# Altium PCB pcb_multilayer.pcbdoc (part 1 of 3)
Units mil, origin at the board's own origin, x right, y up, seen from the top; angles counter-clockwise.
Board outline 8907.73 x 8667.62 mil, 2 copper layers (Top Layer, Bottom Layer); 214 components, 207 nets, 845 pads, 446 vias.
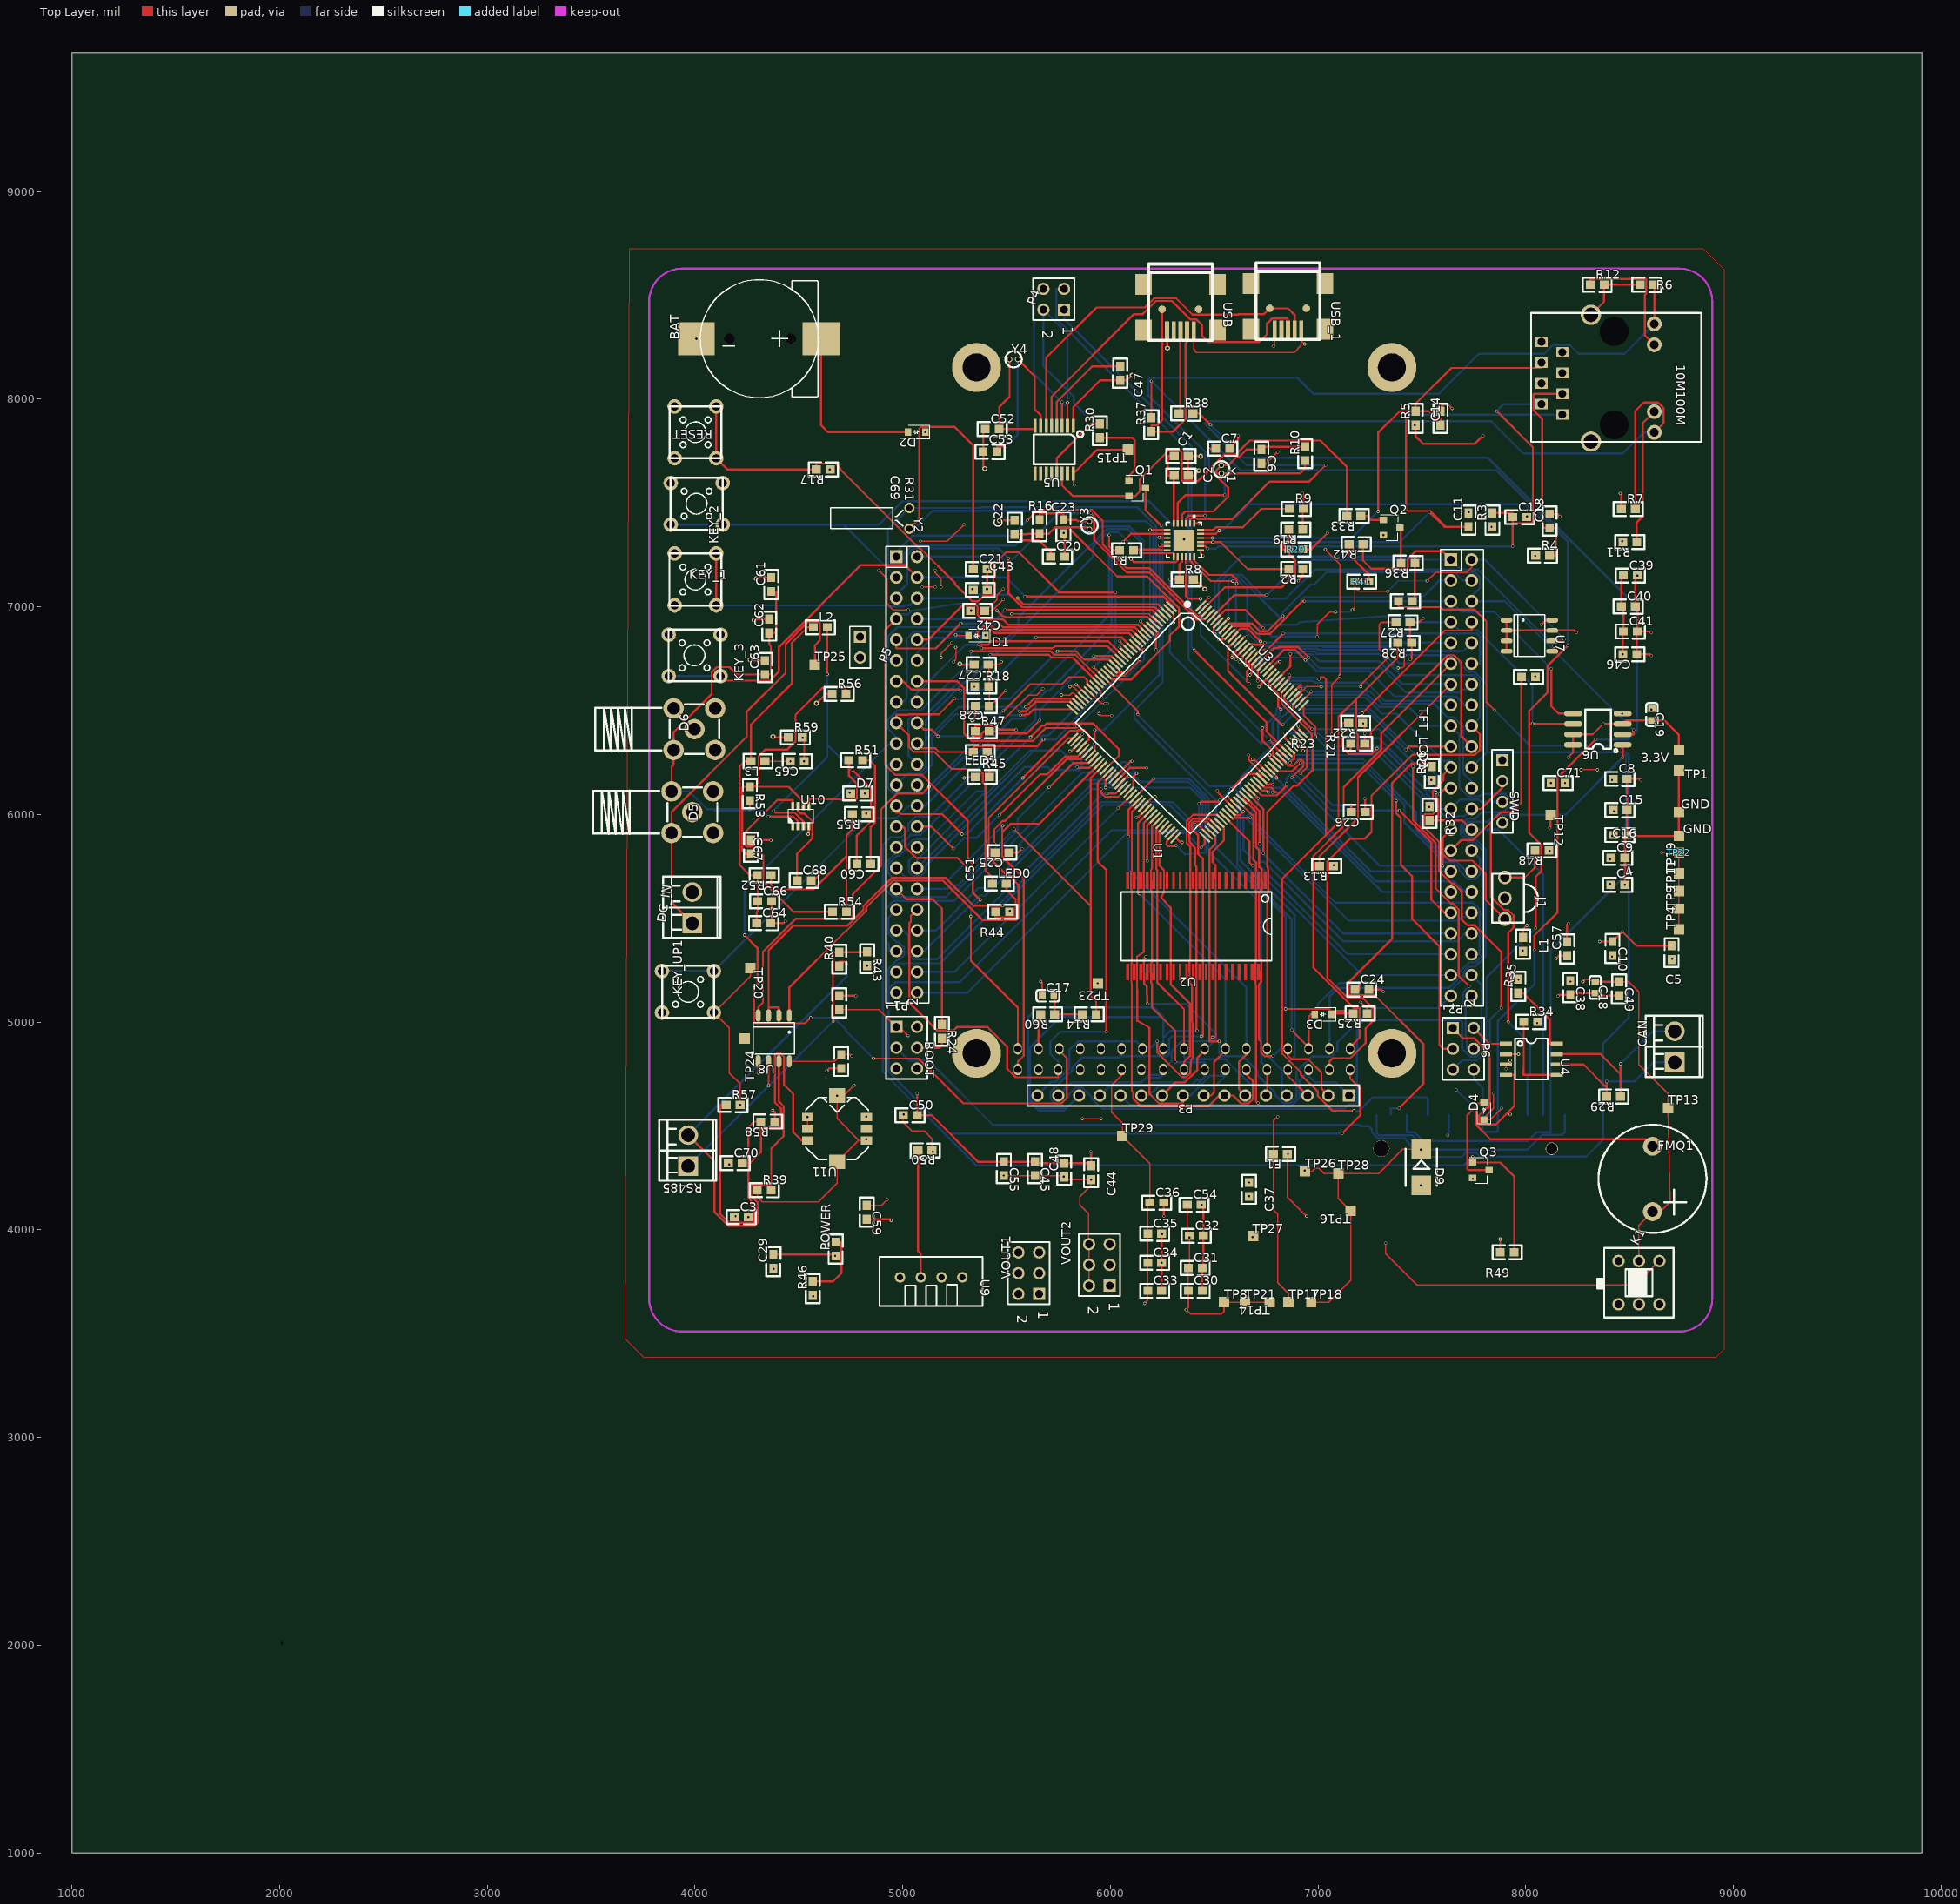
[diagram p0: Top Layer view]
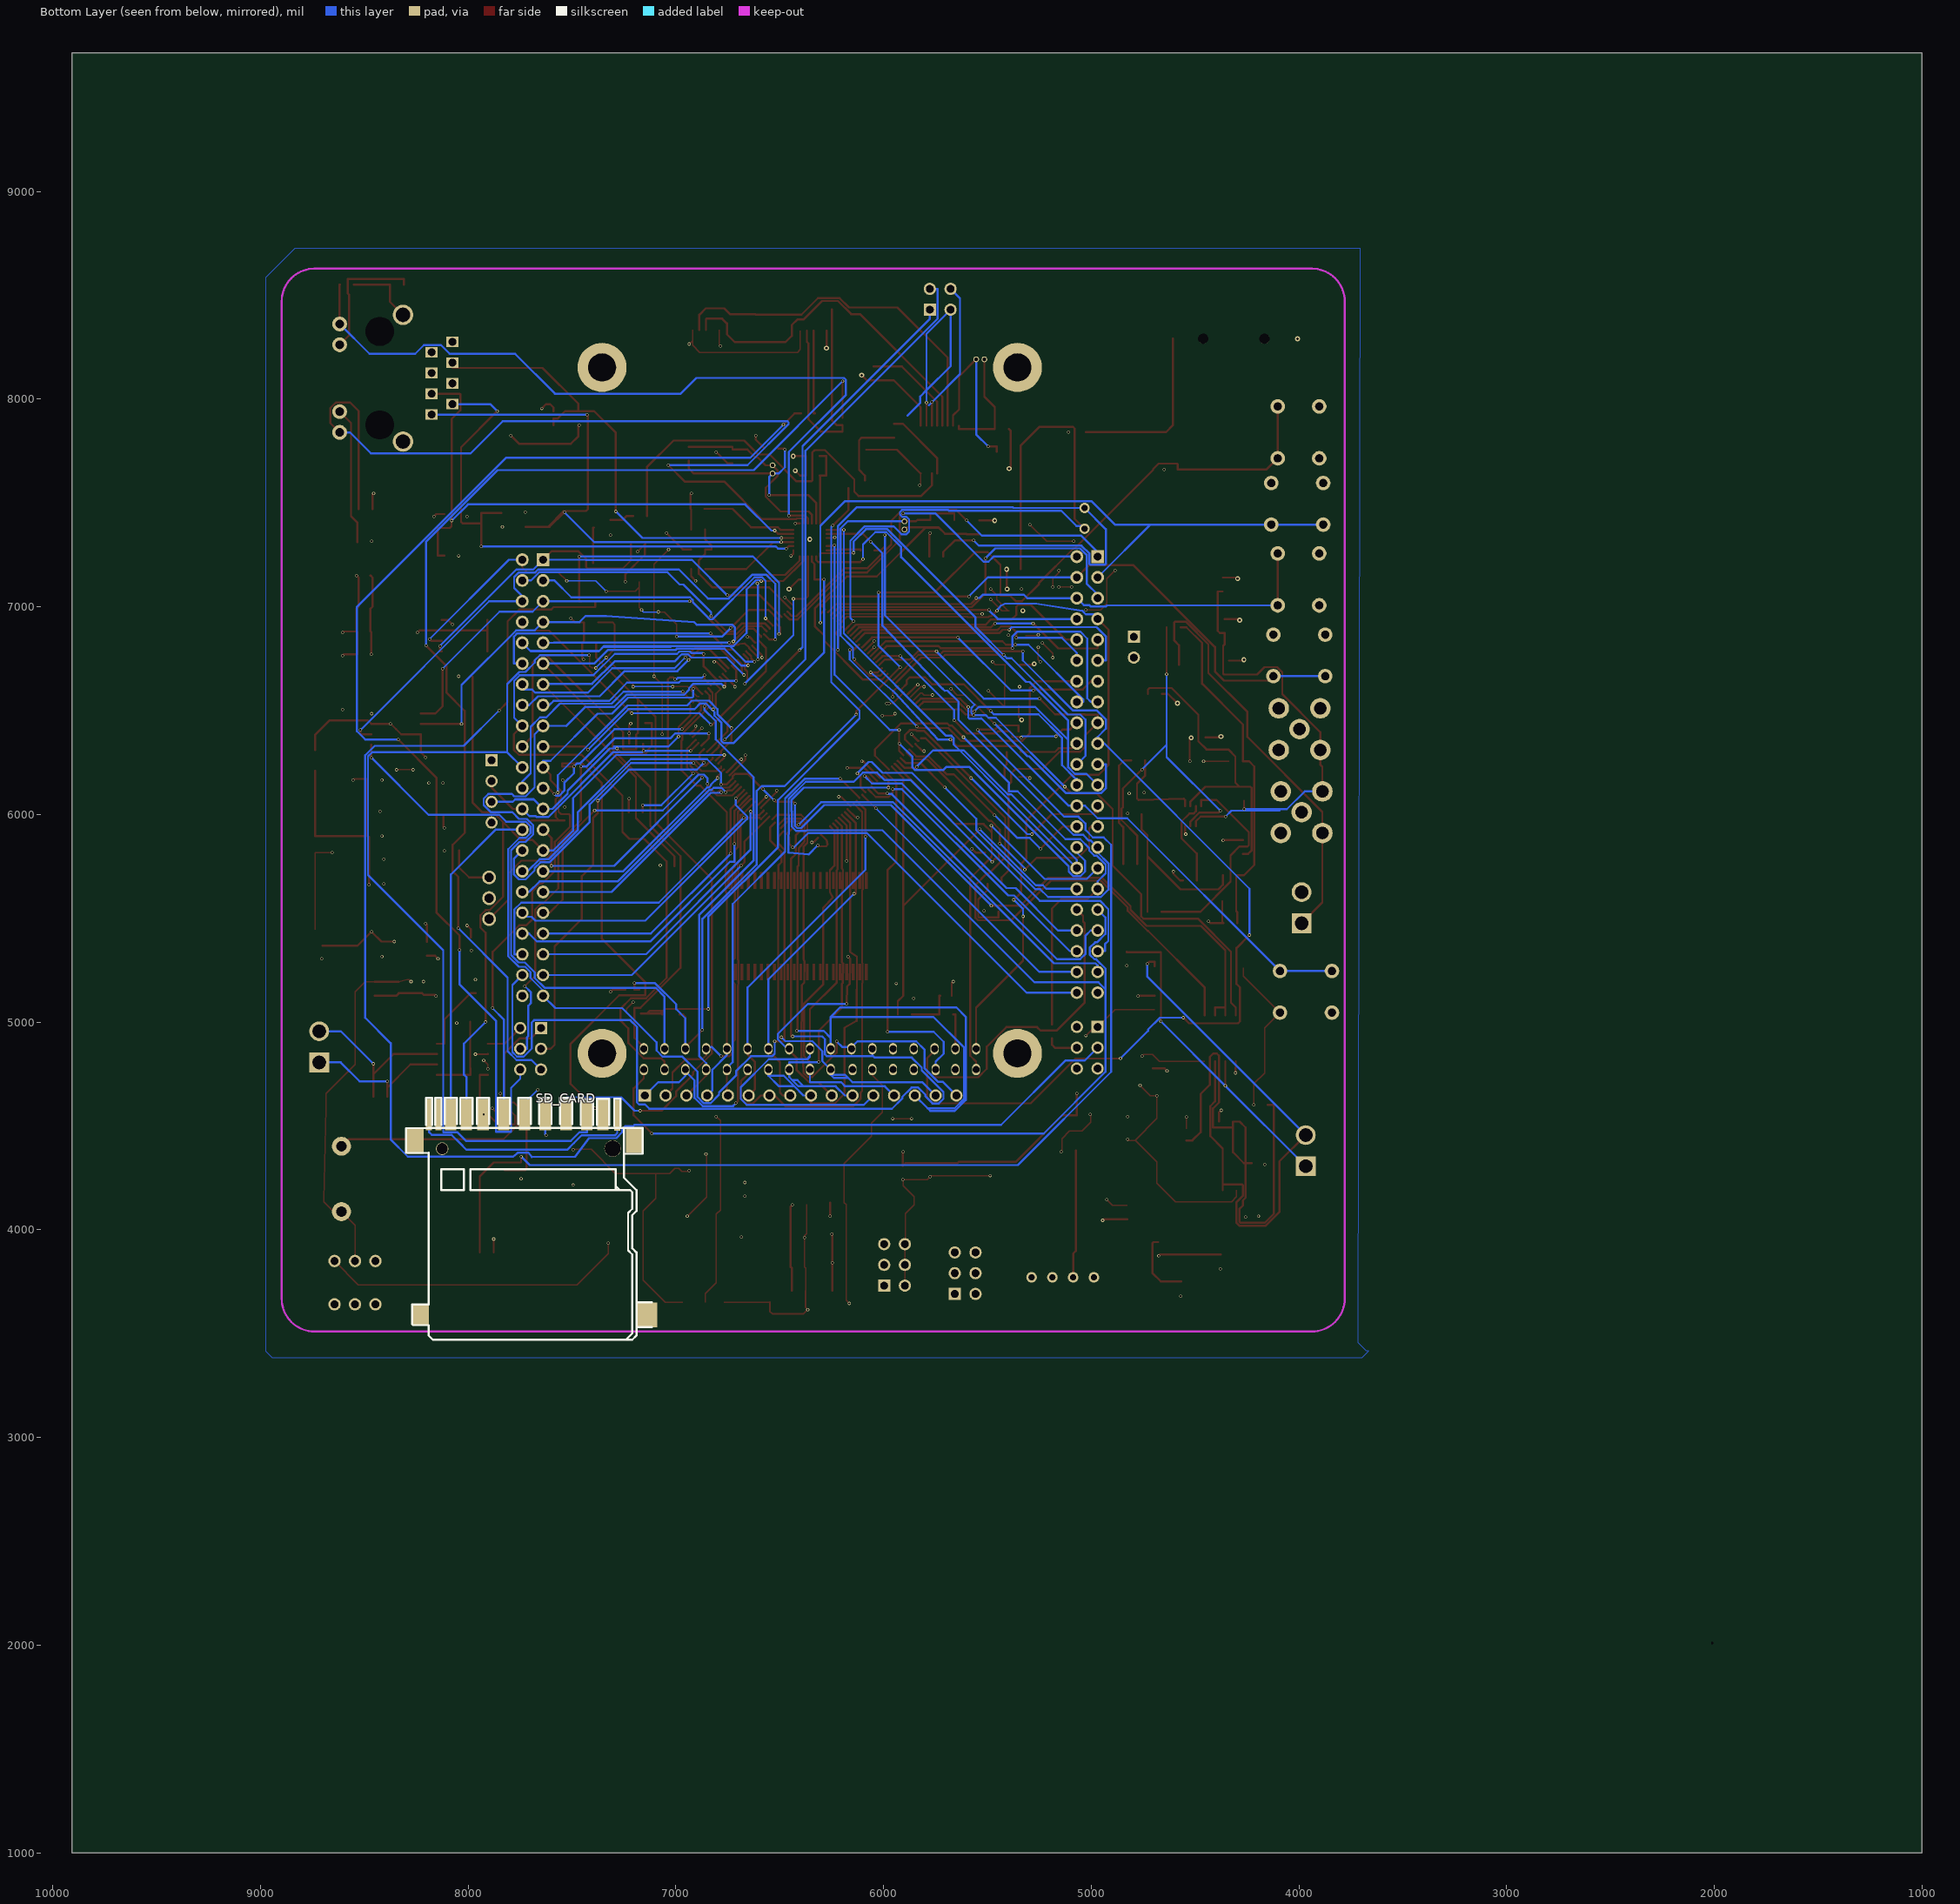
[diagram p1: Bottom Layer view, seen from below]

## Layer stack, top to bottom
Top Layer: signal copper (thickness not stored)
Dielectric: dielectric 12.6, FR-4, Dk 4.8
Bottom Layer: signal copper (thickness not stored)

## Board outline
9907.73,1000 1000,1000 1000,9667.62 9907.73,9667.62
cut-out: 2005,2005 2015,2005 2015,2015 2005,2015 2005,2005

## Components (designator, comment, footprint, x,y, rotation, side; value= is the part's Value field where it differs from the comment)
3.3V "TEST-POINT3X5" PAD.03X.05 8737.11,6310.62 r0 top
10M100M "RJ45" ?#1 8347.11,8100.62 r270 top
BAT "BATT" ?#2 4307.11,8290.62 r90 top
BOOT "Header 3X2" HDR2X3 5019.23,4876.32 r270 top
C1 "104" 3-0603 6344.23,7726.32 r0 top
C2 "10uF" 3-0603 6344.23,7631.32 r0 top
C3 "104" 3-0603 4227.11,4060.62 r0 top
C4 "104" 3-0603 8447.11,5660.62 r0 top
C5 "104" 3-0603 8702.11,5330.62 r270 top
C6 "22pF" 3-0603 6727.11,7720.62 r270 top
C7 "22pF" 3-0603 6544.23,7761.32 r0 top
C8 "104" 3-0603 8457.11,6170.62 r0 top
C9 "10uF" 3-0603 8447.11,5790.62 r0 top
C10 "223" 3-0603 8417.11,5350.62 r270 top
C11 "10pF" 3-0603 7724.23,7421.32 r90 top
C12 "10pF" 3-0603 7974.23,7431.32 r0 top
C13 "10pF" 3-0603 8114.23,7416.32 r90 top
C14 "10pF" 3-0603 7589.23,7911.32 r90 top
C15 "104" 3-0603 8457.11,6020.62 r0 top
C16 "104" 3-0603 8457.11,5900.62 r0 top
C17 "0.1u" C0603 5699.23,5126.32 r0 top
C18 "0.1u" C0603 8334.23,5166.32 r270 top
C19 "0.1u" C0603 8607.11,6480.62 r270 top
C20 "10pF" 3-0603 5749.23,7241.32 r0 top
C21 "10pF" 3-0603 5377.11,7180.62 r0 top
C22 "22pF" 3-0603 5539.23,7386.32 r90 top
C23 "22pF" 3-0603 5774.23,7381.32 r270 top
C24 "104" 3-0603 7214.23,5156.32 r0 top
C25 "225" 3-0603 5474.23,5816.32 r180 top
C26 "225" 3-0603 7189.23,6011.32 r180 top
C27 "10uF" 3-0603 5374.23,6721.32 r180 top
C28 "104" 3-0603 5379.23,6521.32 r180 top
C29 "0.1uF" 3-0603 4377.11,3850.62 r90 top
C30 "104" 3-0603 6412.11,3705.62 r0 top
C31 "104" 3-0603 6412.11,3815.62 r0 top
C32 "104" 3-0603 6417.11,3970.62 r0 top
C33 "104" 3-0603 6217.11,3705.62 r0 top
C34 "104" 3-0603 6217.11,3840.62 r0 top
C35 "104" 3-0603 6217.11,3980.62 r0 top
C36 "104" 3-0603 6227.11,4130.62 r0 top
C37 "104" 3-0603 6667.11,4190.62 r270 top
C38 "104" 3-0603 8214.23,5161.32 r270 top
C39 "104" 3-0603 8507.11,7150.62 r0 top
C40 "104" 3-0603 8497.11,7000.62 r0 top
C41 "104" 3-0603 8507.11,6880.62 r0 top
C42 "225" 3-0603 5357.11,6980.62 r180 top
C43 "104" 3-0603 5377.11,7080.62 r0 top
C44 "104" 3-0603 5907.11,4270.62 r270 top
C45 "10uF" 3-0603 5637.11,4290.62 r270 top
C46 "104" 3-0603 8497.11,6770.62 r180 top
C47 "104" 3-0603 6047.11,8120.62 r270 top
C48 "0.1uF" 3-0603 5777.11,4290.62 r90 top
C49 "1uF" 3-0603 8449.23,5156.32 r270 top
C50 "0.1uF" 3-0603 5039.23,4551.32 r0 top
C51 "1uF" 3-0603 4694.23,5096.32 r90 top
C52 "22pF" 3-0603 5434.23,7856.32 r0 top
C53 "22pF" 3-0603 5424.23,7746.32 r0 top
C54 "104" 3-0603 6407.11,4120.62 r0 top
C55 "0.1uF" 3-0603 5487.11,4290.62 r270 top
C57 "104" 3-0603 8199.23,5356.32 r90 top
C59 "10uF16V" 3-0603 4827.11,4080.62 r270 top
C60 "0.1uF" 3-0603 4809.23,5761.32 r180 top
C61 "1uF50V" 3-0603 4367.11,7110.62 r90 top
C62 "4.7uF50V" 3-0603 4357.11,6910.62 r90 top
C63 "0.1uF" 3-0603 4337.11,6710.62 r90 top
C64 "4.7uF50V" 3-0603 4334.23,5476.32 r0 top
C65 "0.1uF" 3-0603 4489.23,6256.32 r180 top
C66 "0.1uF" 3-0603 4339.23,5581.32 r0 top
C67 "0.1uF" 3-0603 4269.23,5846.32 r90 top
C68 "0.1uF" 3-0603 4529.23,5681.32 r0 top
C69 "2.2uF" 3-0603 4704.23,4806.32 r270 top
C70 "100pF50V" 3-0603 4197.11,4320.62 r0 top
C71 "2.2uF" 3-0603 8159.23,6151.32 r0 top
CAN "CAN" ?#3 8717.11,4880.62 r90 top
D1 "1N4148" D-0805 5357.11,6860.62 r180 top
D2 "1N4148" D-0805 5067.11,7840.62 r180 top
D3 "1N4148" D-0805 7024.23,5036.32 r180 top
D4 "1N4148" D-0805 7799.23,4571.32 r90 top
D5 "1N4007" SMA-TH_SMA-KWE901 3987.11,6010.62 r90 top
D6 "SMAJC27CA27V" SMA-TH_SMA-KWE901 3997.11,6410.62 r90 top
D7 "P6KE6.8CA" 3-0603 4787.11,6100.62 r0 top
D9 "SMBJ5.0A" SMB 7497.11,4300.62 r270 top
DC_IN "DC_IN" ?#3 3987.11,5550.62 r90 top
F1 "1A" 3-0603 6815,4365 r180 top
FMQ1 "FMQ" ?#4 8605,4245 r0 top
GND "TEST-POINT3X5" PAD.03X.05 8737.11,5895.62 r0 top
GND "TEST-POINT3X5" PAD.03X.05 8737.11,6010.62 r0 top
J1 "HS0038" OPTO-TH_HS0038B-A 7899.23,5596.32 r270 top
K1 "BUTTON" SW-TH_BTN8.5-8.5-BUTTON 8545,3745 r0 top
KEY_1 "KEY_M" SW-6-6 3997.11,7130.62 r0 top
KEY_2 "KEY_M" SW-6-6 4007.11,7500.62 r270 top
KEY_3 "KEY_M" SW-6-6 3997.11,6770.62 r270 top
KEY_UP1 "KEY_M" SW-6-6 3967.11,5140.62 r90 top
L1 "220Ohm-100MHZ" 3-0603 7987.11,5370.62 r270 top
L2 "22uH" 3-0603 4607.11,6900.62 r0 top
L3 "220Ohm-100MHZ" 3-0603 4299.23,6256.32 r180 top
LED0 "LED" 3-0603 5469.23,5666.32 r0 top
LED1 "LED" 3-0603 5377.11,6300.62 r0 top
P1 "HEAD2*22" ?#5 4969.23,7246.32 r180 top
P2 "HEAD2*22" ?#5 7639.23,7231.32 r180 top
P3 "HEAD1*16" HDR1X16 6399.23,4646.32 r180 top
P4 "USART1" HDR2X2 5727.11,8480.62 r90 top
P5 "VREF_SEL" HDR1X2 4795,6805 r270 top
P6 "CANUSB" HDR2X3 7699.23,4871.32 r270 top
POWER "LED" 3-0603 4677.11,3910.62 r90 top
Q1 "S8050" SOT-23 6129.23,7571.32 r0 top
Q2 "S8550" SOT-23 7354.23,7381.32 r0 top
Q3 "S9014" SOT-23 7784.23,4286.32 r0 top
R1 "510R" 3-0603 6074.23,7271.32 r180 top
R2 "49.9R" 3-0603 6889.23,7181.32 r180 top
R3 "49.9R" 3-0603 7839.23,7421.32 r90 top
R4 "49.9R" 3-0603 8084.23,7246.32 r0 top
R5 "49.9R" 3-0603 7469.23,7911.32 r90 top
R6 "10K" 3-0603 8587.11,8550.62 r0 top
R7 "10K" 3-0603 8497.11,7470.62 r0 top
R8 "10K" 3-0603 6369.23,7131.32 r0 top
R9 "12.1K" 3-0603 6899.23,7471.32 r0 top
R10 "1M" 3-0603 6937.11,7740.62 r90 top
R11 "510R" 3-0603 8497.11,7310.62 r180 top
R12 "510R" 3-0603 8347.11,8550.62 r0 top
R13 "10K" 3-0603 7037.11,5750.62 r180 top
R14 "4.7k" 3-0603 5894.23,5036.32 r180 top
R16 "1M" 3-0603 5659.23,7381.32 r270 top
R17 "10k" 3-0603 4614.23,7661.32 r180 top
R18 "10R" 3-0603 5384.23,6616.32 r0 top
R19 "0R" 3-0603 6889.23,7371.32 r180 top
R20 "0R" 3-0603 6889.23,7276.32 r180 top
R21 "10k" 3-0603 7187.11,6340.62 r180 top
R22 "10k" 3-0603 7177.11,6440.62 r180 top
R23 "100K" 3-0603 7424.23,7026.32 r0 top
R24 "100K" 3-0603 5189.23,4951.32 r270 top
R25 "10K" 3-0603 7199.23,5041.32 r180 top
R26 "47K" 3-0603 7547.11,6200.62 r90 top
R27 "47K" 3-0603 7405,6925 r180 top
R28 "47K" 3-0603 7414.23,6826.32 r180 top
R29 "120R" 3-0603 8419.23,4641.32 r180 top
R30 "1K" 3-0603 5949.23,7851.32 r90 top
R31 "47K" 3-0603 8009.23,6661.32 r180 top
R32 "47K" 3-0603 7537.11,6000.62 r270 top
R33 "1K" 3-0603 7169.23,7436.32 r180 top
R34 "0R" 3-0603 8027.11,5000.62 r0 top
R35 "0R" 3-0603 7964.23,5176.32 r90 top
R36 "1K" 3-0603 7429.23,7211.32 r180 top
R37 "10R" 3-0603 6197.11,7880.62 r90 top
R38 "10R" 3-0603 6367.11,7930.62 r0 top
R39 "4.7K" 3-0603 4337.11,4190.62 r0 top
R40 "120R" 3-0603 4694.23,5306.32 r90 top
R41 "4.7k" 3-0603 7214.23,7121.32 r0 top
R42 "4.7k" 3-0603 7179.23,7301.32 r180 top
R43 "4.7K" 3-0603 4829.23,5301.32 r270 top
R44 "510R" 3-0603 5477.11,5530.62 r180 top
R45 "510R" 3-0603 5387.11,6180.62 r0 top
R46 "510R" 3-0603 4567.11,3720.62 r90 top
R47 "1K" 3-0603 5387.11,6400.62 r0 top
R48 "51R" 3-0603 8074.23,5826.32 r180 top
R49 "10K" 3-0603 7907.11,3890.62 r180 top
R50 "4.7k" 3-0603 5104.23,4381.32 r180 top
R51 "0R" 3-0603 4777.11,6260.62 r0 top
R52 "41.2K" 3-0603 4329.23,5706.32 r180 top
R53 "470K" 3-0603 4264.23,6096.32 r270 top
R54 "51K" 3-0603 4699.23,5531.32 r0 top
R55 "7.68K" 3-0603 4787.11,6000.62 r180 top
R56 "200K" 3-0603 4697.11,6580.62 r0 top
R57 "12K" 3-0603 4187.11,4600.62 r0 top
R58 "10K" 3-0603 4347.11,4520.62 r180 top
R59 "0R" 3-0603 4487.11,6370.62 r0 top
R60 "1K" 3-0603 5694.23,5036.32 r180 top
RESET "KEY_M" SW-6-6 4007.11,7840.62 r180 top
RS485 "RS485" ?#3 3967.11,4380.62 r90 top
SD_CARD "sd card" ?#6 7645,4095 r0 bottom
SWD "SWD" HDR1X4 7887.11,6110.62 r270 top
TFT_LCD1 "3.2 TFT LCD (ILI9341) XTP2046" "3.2 TFT LCD (ILI9341) XTP2046" 7154.23,4771.32 r270 top
TP1 "TEST-POINT3X5" PAD.03X.05 8737.11,6210.62 r0 top
TP4 "TEST-POINT3X5" PAD.03X.05 8737.11,5445.62 r90 top
TP8 "TEST-POINT3X5" PAD.03X.05 6547.11,3650.62 r0 top
TP9 "TEST-POINT3X5" PAD.03X.05 8737.11,5545.62 r90 top
TP11 "TEST-POINT3X5" PAD.03X.05 8737.11,5630.62 r90 top
TP12 "TEST-POINT3X5" PAD.03X.05 8119.23,5996.32 r270 top
TP13 "TEST-POINT3X5" PAD.03X.05 8685,4585 r0 top
TP14 "TEST-POINT3X5" PAD.03X.05 6767.11,3650.62 r180 top
TP15 "TEST-POINT3X5" PAD.03X.05 6084.23,7756.32 r180 top
TP16 "TEST-POINT3X5" PAD.03X.05 7157.11,4090.62 r180 top
TP17 "TEST-POINT3X5" PAD.03X.05 6857.11,3650.62 r0 top
TP18 "TEST-POINT3X5" PAD.03X.05 6967.11,3650.62 r0 top
TP19 "TEST-POINT3X5" PAD.03X.05 8737.11,5715.62 r90 top
TP20 "TEST-POINT3X5" PAD.03X.05 4267.11,5260.62 r270 top
TP21 "TEST-POINT3X5" PAD.03X.05 6647.11,3650.62 r0 top
TP22 "TEST-POINT3X5" PAD.03X.05 8737.11,5815.62 r90 top
TP23 "TEST-POINT3X5" PAD.03X.05 5939.23,5186.32 r180 top
TP24 "TEST-POINT3X5" PAD.03X.05 4239.23,4921.32 r90 top
TP25 "TEST-POINT3X5" PAD.03X.05 4577.11,6720.62 r0 top
TP26 "TEST-POINT3X5" PAD.03X.05 6937.11,4280.62 r0 top
TP27 "TEST-POINT3X5" PAD.03X.05 6687.11,3970.62 r0 top
TP28 "TEST-POINT3X5" PAD.03X.05 7097.11,4270.62 r0 top
TP29 "TEST-POINT3X5" PAD.03X.05 6057.11,4450.62 r0 top
U1 "LAN8720A" QFN24_L4.0-W4.0-P0.5-TL-EP2.45 6354.23,7321.32 r270 top
U2 "IS62WV51216" TSOP44 6414.23,5461.32 r180 top
U3 "STM32F407ZET6" ?#7 6374.23,6446.32 r316 top
U4 "MC33901SEF" ?#8 8027.11,4820.62 r270 top
U5 "CH340G" TSSOP16MIO065 5729.23,7756.32 r180 top
U6 "W25X128" SOIC-8 8347.11,6410.62 r180 top
U7 "24C02" SO-8 8017.11,6860.62 r270 top
U8 "MAX3485" SO-8 4379.23,4921.32 r180 top
U9 "DHT11DS18B20" ?#9 5137.11,3770.62 r270 top
U10 "MP4420S" SOT23-8 4509.23,5991.32 r0 top
U11 "MP20045DN" SW-SMD_SKRHACE010_MINIMAL_EDIT 4684.23,4486.32 r180 top
USB "USB-B(Mini)" USB_MINI_B 6337.11,8440.62 r270 top
USB_1 "USB" USB_MINI_B 6855,8445 r270 top
VOUT1 "VCC3.3" HDR2X3 5607.11,3790.62 r90 top
VOUT2 "VCC5" HDR2X3 5947.11,3830.62 r90 top
Y1 "25MHz" TXAL-1.9*6 6534.23,7661.32 r270 top
Y2 "32.768K" ?#10 4837.11,7430.62 r270 top
Y3 "8MHz" TXAL-1.9*6 5899.23,7391.32 r90 top
Y4 "12MHz" TXAL-1.9*6 5534.23,8191.32 r0 top

## Footprints (in the part's own frame and the unit in brackets; to place one, negate y for a bottom-side part, rotate by r counter-clockwise, add the part's x,y. Pads: shape width x height; smd on the part's side, far side on the other; paste and mask are expansions set on the pad)
3-0603 [mil]
  rect 43x39 smd paste+0 mask+2: 1(29.99,0) 2(-37.01,0)
  silkscreen extent -74,-34 66,34
"3.2 TFT LCD (ILI9341) XTP2046" [mm]
  oval 1.4x1 hole 0.8 slot 0.805 at 0 deg paste+0 mask+0.051: 1(-2.54,0) 2(0,0) 3(-2.54,-2.54) 4(0,-2.54) 5(-2.54,-5.08) 6(0,-5.08) 7(-2.54,-7.62) 8(0,-7.62) 9(-2.54,-10.16) 10(0,-10.16) 11(-2.54,-12.7) 12(0,-12.7) 13(-2.54,-15.24) 14(0,-15.24) 15(-2.54,-17.78) 16(0,-17.78) 17(-2.54,-20.32) 18(0,-20.32) 19(-2.54,-22.86) 20(0,-22.86) 21(-2.54,-25.4) 22(0,-25.527) 23(-2.54,-27.94) 24(0,-27.94) 25(-2.54,-30.48) 26(0,-30.48) 27(-2.54,-33.02) 28(0,-33.02) 29(-2.54,-35.56) 30(0,-35.687) 31(-2.54,-38.1) 32(0,-38.1) 33(-2.54,-40.64) 34(0,-40.64)
  round 6 hole 3.4 slot 3.405 at 0 deg paste+0 mask+0.051: 100(-85.881,5.109) 101(-1.981,5.109) 102(-85.881,-45.691) 103(-1.981,-45.691)
C0603 [mm]
  rect 0.8x0.9 smd paste+0 mask+0.051: 1(-0.7,0) 2(0.7,0)
  silkscreen extent -1.41,-0.71 1.39,0.72
D-0805 [mm]
  rect 0.8x0.9 smd paste+0 mask+0.051: 1(1.049,0) 2(-1.049,0)
  silkscreen extent -1.6,-0.8 1,0.8
HDR1X2 [mil]
  rect 59x59 hole 36 slot 36.2 at 0 deg paste+0 mask+2: 1(-50,0)
  round 59 hole 36 slot 36.2 at 0 deg paste+0 mask+2: 2(50,0)
  silkscreen extent -100,-50 100,50
HDR1X4 [mil]
  rect 59x59 hole 36 slot 36.2 at 0 deg paste+0 mask+2: 1(-150,0)
  round 59 hole 36 slot 36.2 at 0 deg paste+0 mask+2: 2(-50,0) 3(50,0) 4(150,0)
  silkscreen extent -200,-50 200,50
HDR1X16 [mil]
  rect 59x59 hole 36 slot 36.2 at 0 deg paste+0 mask+2: 1(-749.99,0)
  round 59 hole 36 slot 36.2 at 0 deg paste+0 mask+2: 2(-649.99,0) 3(-549.99,0) 4(-449.99,0) 5(-349.99,0) 6(-249.99,0) 7(-149.99,0) 8(-49.99,0) 9(50.01,0) 10(150.01,0) 11(250.01,0) 12(350.01,0) 13(450.01,0) 14(550.01,0) 15(650.01,0) 16(750.01,0)
  silkscreen extent -800,-50 800,50
HDR2X2 [mil]
  rect 59x59 hole 36 slot 36.2 at 0 deg paste+0 mask+2: 1(-50,-50.01)
  round 59 hole 36 slot 36.2 at 0 deg paste+0 mask+2: 2(-50,49.99) 3(50,-50.01) 4(50,49.99)
  silkscreen extent -100,-100 100,100
HDR2X3 [mil]
  rect 59x59 hole 36 slot 36.2 at 0 deg paste+0 mask+2: 1(-100,-50.01)
  round 59 hole 36 slot 36.2 at 0 deg paste+0 mask+2: 2(-100,49.99) 3(0,-50.01) 4(0,49.99) 5(100,-50.01) 6(100,49.99)
  silkscreen extent -150,-100 150,100
OPTO-TH_HS0038B-A [mm]
  round 1.7 hole 1.1 slot 1.105 at 0 deg paste+0 mask+0.051: 1(2.54,0) 2(0,0) 3(-2.54,0)
  silkscreen extent -3,-1.56 3,4.05
PAD.03X.05 [mil]
  rect 50x50 smd paste+0 mask+2: P$1(0,0)
QFN24_L4.0-W4.0-P0.5-TL-EP2.45 [mil]
  rect 32x10 smd paste+0 mask+2: 1(-80,49.21) 2(-80,29.52) 3(-80,9.83) 4(-80,-9.85) 5(-80,-29.54) 6(-80,-49.22) 13(80,-49.22) 14(80,-29.54) 15(80,-9.85) 16(80,9.83) 17(80,29.52) 18(80,49.2)
  rect 10x32.01 smd paste+0 mask+2: 7(-49.21,-80.01) 8(-29.53,-80.01) 9(-9.84,-80.01) 10(9.84,-80.01) 11(29.53,-80.01) 12(49.21,-80.01) 19(49.21,79.99) 20(29.53,79.99) 21(9.84,79.99) 22(-9.84,79.99) 23(-29.53,79.99) 24(-49.21,79.99)
  rect 100x100 smd paste+0 mask+2: 25(0,-0.01)
  silkscreen extent -119,-85 85,85
SMA-TH_SMA-KWE901 [mm]
  round 2.5 hole 1.5 slot 1.505 at 0 deg paste+0 mask+0.051: 1(-2.54,2.54) 2(2.54,2.54) 3(2.54,-2.54) 4(-2.54,-2.54) 5(0,0)
  silkscreen extent -3.05,-3.05 3.05,12.12
SMB [mil]
  rect 94.5x94.5 smd paste+0 mask+2: 1(87,0) 2(-87,0)
  silkscreen extent -89,-75 89,75
SO-8 [mil]
  oval 24x58 smd paste+0 mask+2: 1(-75,-110) 2(-25,-110) 3(25,-110) 4(75,-110) 5(75,110) 6(25,110) 7(-25,110) 8(-75,110)
  silkscreen extent -100,-75 100,75
SOIC-8 [mm]
  oval 2.2x0.7 smd paste+0 mask+0.051: 1(-3.023,1.905) 2(-3.023,0.635) 3(-3.023,-0.635) 4(-3.023,-1.905) 5(3.023,-1.905) 6(3.023,-0.635) 7(3.023,0.635) 8(3.023,1.905)
  silkscreen extent -2.37,-2.41 1.55,2.83
SOT23-8 [mil]
  rect 16x40 smd paste+0 mask+2: 1(-39.01,-48) 2(-13.01,-48) 3(12.99,-48) 4(38.99,-48) 5(38.99,48) 6(12.99,48) 7(-13.01,48) 8(-39.01,48)
  silkscreen extent -60,-64 60,64
SOT-23 [mm]
  rect 0.9x0.8 smd paste+0 mask+0.051: 1(-1,0.95) 2(-1,-0.95) 3(1,0)
  silkscreen extent -1.4,-1.58 0.76,1.58
SW-6-6 [mil]
  round 70 hole 38 slot 38.2 at 0 deg paste+0 mask+2: 1(-95,-124) 1(-95,126) 2(105,-124) 2(105,126)
  silkscreen extent -120,-124 130,126
SW-SMD_SKRHACE010_MINIMAL_EDIT [mm]
  rect 1.4x1 smd paste+0 mask+0.051: 1(3.6,-1.43) 2(3.6,0) 3(3.6,1.43) 4(-3.6,-1.43) 5(-3.6,0) 6(-3.6,1.43)
  rect 2x1.8 smd paste+0 mask+0.051: 7(0,-4.05) 8(0,4.05)
  silkscreen extent -3.81,-3.81 3.81,3.81
SW-TH_BTN8.5-8.5-BUTTON [mil]
  round 60 hole 36 slot 36.2 at 0 deg paste+0 mask+2: 1(-98.43,-104.33) 2(0,-104.33) 3(98.42,-104.33) 4(98.42,104.33) 5(0,104.33) 6(-98.43,104.33)
  silkscreen extent -201,-167 167,167
TSOP44 [mil]
  Top Layer region: -147.64,259.84 -135.83,259.84 -135.83,181.1 -147.64,181.1 -147.64,259.84 -147.64,259.84 -147.64,259.84 -147.64,259.84 -147.64,259.84
  Top Layer region: -116.14,259.84 -104.33,259.84 -104.33,181.1 -116.14,181.1 -116.14,259.84 -116.14,259.84 -116.14,259.84 -116.14,259.84 -116.14,259.84
  Top Layer region: -84.65,259.84 -72.83,259.84 -72.83,181.1 -84.65,181.1 -84.65,259.84 -84.65,259.84 -84.65,259.84 -84.65,259.84 -84.65,259.84
  Top Layer region: -53.15,259.84 -41.34,259.84 -41.34,181.1 -53.15,181.1 -53.15,259.84 -53.15,259.84 -53.15,259.84 -53.15,259.84 -53.15,259.84
  Top Layer region: -21.65,259.84 -9.84,259.84 -9.84,181.1 -21.65,181.1 -21.65,259.84 -21.65,259.84 -21.65,259.84 -21.65,259.84 -21.65,259.84
  Top Layer region: 9.84,259.84 21.65,259.84 21.65,181.1 9.84,181.1 9.84,259.84 9.84,259.84 9.84,259.84 9.84,259.84 9.84,259.84
  Top Layer region: 41.34,259.84 53.15,259.84 53.15,181.1 41.34,181.1 41.34,259.84 41.34,259.84 41.34,259.84 41.34,259.84 41.34,259.84
  Top Layer region: 72.83,259.84 84.65,259.84 84.65,181.1 72.83,181.1 72.83,259.84 72.83,259.84 72.83,259.84 72.83,259.84 72.83,259.84
  Top Layer region: 104.33,259.84 116.14,259.84 116.14,181.1 104.33,181.1 104.33,259.84 104.33,259.84 104.33,259.84 104.33,259.84 104.33,259.84
  Top Layer region: 135.83,259.84 147.64,259.84 147.64,181.1 135.83,181.1 135.83,259.84 135.83,259.84 135.83,259.84 135.83,259.84 135.83,259.84
  Top Layer region: 167.32,259.84 179.13,259.84 179.13,181.1 167.32,181.1 167.32,259.84 167.32,259.84 167.32,259.84 167.32,259.84 167.32,259.84
  Top Layer region: -336.61,-181.1 -324.8,-181.1 -324.8,-259.84 -336.61,-259.84 -336.61,-181.1 -336.61,-181.1 -336.61,-181.1 -336.61,-181.1 -336.61,-181.1
  Top Layer region: -305.12,-181.1 -293.31,-181.1 -293.31,-259.84 -305.12,-259.84 -305.12,-181.1 -305.12,-181.1 -305.12,-181.1 -305.12,-181.1 -305.12,-181.1
  Top Layer region: -273.62,-181.1 -261.81,-181.1 -261.81,-259.84 -273.62,-259.84 -273.62,-181.1 -273.62,-181.1 -273.62,-181.1 -273.62,-181.1 -273.62,-181.1
  Top Layer region: -242.13,-181.1 -230.31,-181.1 -230.31,-259.84 -242.13,-259.84 -242.13,-181.1 -242.13,-181.1 -242.13,-181.1 -242.13,-181.1 -242.13,-181.1
  Top Layer region: -210.63,-181.1 -198.82,-181.1 -198.82,-259.84 -210.63,-259.84 -210.63,-181.1 -210.63,-181.1 -210.63,-181.1 -210.63,-181.1 -210.63,-181.1
  Top Layer region: -179.13,-181.1 -167.32,-181.1 -167.32,-259.84 -179.13,-259.84 -179.13,-181.1 -179.13,-181.1 -179.13,-181.1 -179.13,-181.1 -179.13,-181.1
  Top Layer region: -147.64,-181.1 -135.83,-181.1 -135.83,-259.84 -147.64,-259.84 -147.64,-181.1 -147.64,-181.1 -147.64,-181.1 -147.64,-181.1 -147.64,-181.1
  Top Layer region: -116.14,-181.1 -104.33,-181.1 -104.33,-259.84 -116.14,-259.84 -116.14,-181.1 -116.14,-181.1 -116.14,-181.1 -116.14,-181.1 -116.14,-181.1
  Top Layer region: -84.65,-181.1 -72.83,-181.1 -72.83,-259.84 -84.65,-259.84 -84.65,-181.1 -84.65,-181.1 -84.65,-181.1 -84.65,-181.1 -84.65,-181.1
  Top Layer region: -53.15,-181.1 -41.34,-181.1 -41.34,-259.84 -53.15,-259.84 -53.15,-181.1 -53.15,-181.1 -53.15,-181.1 -53.15,-181.1 -53.15,-181.1
  Top Layer region: -21.65,-181.1 -9.84,-181.1 -9.84,-259.84 -21.65,-259.84 -21.65,-181.1 -21.65,-181.1 -21.65,-181.1 -21.65,-181.1 -21.65,-181.1
  Top Layer region: 9.84,-181.1 21.65,-181.1 21.65,-259.84 9.84,-259.84 9.84,-181.1 9.84,-181.1 9.84,-181.1 9.84,-181.1 9.84,-181.1
  Top Layer region: 41.34,-181.1 53.15,-181.1 53.15,-259.84 41.34,-259.84 41.34,-181.1 41.34,-181.1 41.34,-181.1 41.34,-181.1 41.34,-181.1
  Top Layer region: 72.83,-181.1 84.65,-181.1 84.65,-259.84 72.83,-259.84 72.83,-181.1 72.83,-181.1 72.83,-181.1 72.83,-181.1 72.83,-181.1
  Top Layer region: 104.33,-181.1 116.14,-181.1 116.14,-259.84 104.33,-259.84 104.33,-181.1 104.33,-181.1 104.33,-181.1 104.33,-181.1 104.33,-181.1
  Top Layer region: 135.83,-181.1 147.64,-181.1 147.64,-259.84 135.83,-259.84 135.83,-181.1 135.83,-181.1 135.83,-181.1 135.83,-181.1 135.83,-181.1
  Top Layer region: 167.32,-181.1 179.13,-181.1 179.13,-259.84 167.32,-259.84 167.32,-181.1 167.32,-181.1 167.32,-181.1 167.32,-181.1 167.32,-181.1
  Top Layer region: 198.82,-181.1 210.63,-181.1 210.63,-259.84 198.82,-259.84 198.82,-181.1 198.82,-181.1 198.82,-181.1 198.82,-181.1 198.82,-181.1
  Top Layer region: 230.31,-181.1 242.13,-181.1 242.13,-259.84 230.31,-259.84 230.31,-181.1 230.31,-181.1 230.31,-181.1 230.31,-181.1 230.31,-181.1
  Top Layer region: 261.81,-181.1 273.62,-181.1 273.62,-259.84 261.81,-259.84 261.81,-181.1 261.81,-181.1 261.81,-181.1 261.81,-181.1 261.81,-181.1
  Top Layer region: 293.31,-181.1 305.12,-181.1 305.12,-259.84 293.31,-259.84 293.31,-181.1 293.31,-181.1 293.31,-181.1 293.31,-181.1 293.31,-181.1
  Top Layer region: 324.8,-181.1 336.61,-181.1 336.61,-259.84 324.8,-259.84 324.8,-181.1 324.8,-181.1 324.8,-181.1 324.8,-181.1 324.8,-181.1
  Top Layer region: 324.8,259.84 336.61,259.84 336.61,181.1 324.8,181.1 324.8,259.84 324.8,259.84 324.8,259.84 324.8,259.84 324.8,259.84
  Top Layer region: 293.31,259.84 305.12,259.84 305.12,181.1 293.31,181.1 293.31,259.84 293.31,259.84 293.31,259.84 293.31,259.84 293.31,259.84
  Top Layer region: 261.81,259.84 273.62,259.84 273.62,181.1 261.81,181.1 261.81,259.84 261.81,259.84 261.81,259.84 261.81,259.84 261.81,259.84
  Top Layer region: 230.31,259.84 242.13,259.84 242.13,181.1 230.31,181.1 230.31,259.84 230.31,259.84 230.31,259.84 230.31,259.84 230.31,259.84
  Top Layer region: 198.82,259.84 210.63,259.84 210.63,181.1 198.82,181.1 198.82,259.84 198.82,259.84 198.82,259.84 198.82,259.84 198.82,259.84
  Top Layer region: 167.32,259.84 179.13,259.84 179.13,181.1 167.32,181.1 167.32,259.84 167.32,259.84 167.32,259.84 167.32,259.84 167.32,259.84
  Top Layer region: 135.83,259.84 147.64,259.84 147.64,181.1 135.83,181.1 135.83,259.84 135.83,259.84 135.83,259.84 135.83,259.84 135.83,259.84
  Top Layer region: 104.33,259.84 116.14,259.84 116.14,181.1 104.33,181.1 104.33,259.84 104.33,259.84 104.33,259.84 104.33,259.84 104.33,259.84
  Top Layer region: 72.83,259.84 84.65,259.84 84.65,181.1 72.83,181.1 72.83,259.84 72.83,259.84 72.83,259.84 72.83,259.84 72.83,259.84
  Top Layer region: 41.34,259.84 53.15,259.84 53.15,181.1 41.34,181.1 41.34,259.84 41.34,259.84 41.34,259.84 41.34,259.84 41.34,259.84
  Top Layer region: 9.84,259.84 21.65,259.84 21.65,181.1 9.84,181.1 9.84,259.84 9.84,259.84 9.84,259.84 9.84,259.84 9.84,259.84
  Top Layer region: -21.65,259.84 -9.84,259.84 -9.84,181.1 -21.65,181.1 -21.65,259.84 -21.65,259.84 -21.65,259.84 -21.65,259.84 -21.65,259.84
  Top Layer region: -53.15,259.84 -41.34,259.84 -41.34,181.1 -53.15,181.1 -53.15,259.84 -53.15,259.84 -53.15,259.84 -53.15,259.84 -53.15,259.84
  Top Layer region: -84.65,259.84 -72.83,259.84 -72.83,181.1 -84.65,181.1 -84.65,259.84 -84.65,259.84 -84.65,259.84 -84.65,259.84 -84.65,259.84
  Top Layer region: -116.14,259.84 -104.33,259.84 -104.33,181.1 -116.14,181.1 -116.14,259.84 -116.14,259.84 -116.14,259.84 -116.14,259.84 -116.14,259.84
  Top Layer region: -147.64,259.84 -135.83,259.84 -135.83,181.1 -147.64,181.1 -147.64,259.84 -147.64,259.84 -147.64,259.84 -147.64,259.84 -147.64,259.84
  Top Layer region: -179.13,259.84 -167.32,259.84 -167.32,181.1 -179.13,181.1 -179.13,259.84 -179.13,259.84 -179.13,259.84 -179.13,259.84 -179.13,259.84
  Top Layer region: -210.63,259.84 -198.82,259.84 -198.82,181.1 -210.63,181.1 -210.63,259.84 -210.63,259.84 -210.63,259.84 -210.63,259.84 -210.63,259.84
  Top Layer region: -242.13,259.84 -230.31,259.84 -230.31,181.1 -242.13,181.1 -242.13,259.84 -242.13,259.84 -242.13,259.84 -242.13,259.84 -242.13,259.84
  Top Layer region: -273.62,259.84 -261.81,259.84 -261.81,181.1 -273.62,181.1 -273.62,259.84 -273.62,259.84 -273.62,259.84 -273.62,259.84 -273.62,259.84
  Top Layer region: -305.12,259.84 -293.31,259.84 -293.31,181.1 -305.12,181.1 -305.12,259.84 -305.12,259.84 -305.12,259.84 -305.12,259.84 -305.12,259.84
  silkscreen extent -362,-165 362,165
TSSOP16MIO065 [mm]
  rect 0.38x1.7 smd paste+0 mask+0.051: 1(-2.337,-2.921) 2(-1.625,-2.921) 3(-0.965,-2.921) 4(-0.33,-2.921) 5(0.33,-2.921) 6(0.965,-2.921) 7(1.626,-2.921) 8(2.337,-2.921) 9(2.337,2.921) 10(1.626,2.921) 11(0.965,2.921) 12(0.33,2.921) 13(-0.33,2.921) 14(-0.965,2.921) 15(-1.625,2.921) 16(-2.337,2.921)
  silkscreen extent -3.56,-2.29 2.49,1.8
TXAL-1.9*6 [mm]
  round 0.7 hole 0.4 slot 0.405 at 0 deg paste+0 mask+0.051: 1(-0.5,0) 2(0.5,0)
  silkscreen extent -1,-1 1,1
USB_MINI_B [mil]
  rect 92x20 smd paste+0 mask+2: 1(112,64) 2(112,32) 3(112,0) 4(112,-32) 5(112,-64)
  round 36 smd paste+0 mask+2: 2(8,-88) ""(8,88)
  rect 100x80 smd paste+0 mask+2: 6(108,178) 7(-112,178) 8(108,-178) 9(-112,-178)
  silkscreen extent -210,-154 158,154
?#1 [mil]
  rect 51x59 hole 36 slot 36.2 at 90 deg paste+0 mask+2: 1(175,-171.5) 2(125,-271.5) 3(75,-171.5) 4(25,-271.5) 5(-25,-171.5) 6(-75,-271.5) 7(-125,-171.5) 8(-175,-271.5)
  round 71 hole 40 slot 40.2 at 0 deg paste+0 mask+2: 9(261,271.5) 10(161,271.5) 11(-161,271.5) 12(-261,271.5)
  round 98 hole 68 slot 68.2 at 0 deg paste+0 mask+2: 13(305,-33.5) 14(-305,-33.5)
  round 79 hole 138 slot 138.2 at 0 deg paste+0 mask+2: 15(-225,78.5) 16(225,78.5)
  silkscreen extent -314,-321 307,499
?#2 [mil]
  round 47 hole 48 slot 48.2 at 90 deg paste+0 mask+2: 0(0,141) 0(0,-154)
  rect 158x177 smd paste+0 mask+2: 1(0,-300) 2(0,300)
  silkscreen extent -284,-287 284,282
?#3 [mil]
  rect 95x95 hole 64 slot 64.2 at 0 deg paste+0 mask+2: 1(-75,0)
  round 95 hole 64 slot 64.2 at 0 deg paste+0 mask+2: 2(75,0)
  silkscreen extent -145,-136 150,140
?#4 [mil]
  round 91 hole 48 slot 48.2 at 90 deg paste+0 mask+2: 1(5,-158) 2(5,157)
  silkscreen extent -255,-260 265,260
?#5 [mil]
  rect 62x62 hole 36 slot 36.2 at 90 deg paste+0 mask+2: 1(0.01,5)
  round 62 hole 36 slot 36.2 at 90 deg paste+0 mask+2: 2(-99.99,5) 3(0.01,105) 4(-99.99,105) 5(0.01,205) 6(-99.99,205) 7(0.01,305) 8(-99.99,305) 9(0.01,405) 10(-99.99,405) 11(0.01,505) 12(-99.99,505) 13(0.01,605) 14(-99.99,605) 15(0.01,705) 16(-99.99,705) 17(0.01,805) 18(-99.99,805) 19(0.01,905) 20(-99.99,905) 21(0.01,1005) 22(-99.99,1005) 23(0.01,1105) 24(-99.99,1105) 25(0.01,1205) 26(-99.99,1205) 27(0.01,1305) 28(-99.99,1305) 29(0.01,1405) 30(-99.99,1405) 31(0.01,1505) 32(-99.99,1505) 33(0.01,1605) 34(-99.99,1605)
  round 60 hole 36 slot 36.2 at 90 deg paste+0 mask+2: 35(0.01,1705) 36(-99.99,1705) 37(0.01,1805) 38(-99.99,1805) 39(0.01,1905) 40(-99.99,1905) 41(0.01,2005) 42(-99.99,2005) 43(0.01,2105) 44(-99.99,2105)
  silkscreen extent -158,-45 50,2155
?#6 [mil]
  rect 100x120 smd paste+0 mask+2: 0(-505,505)
  rect 80x120 smd paste+0 mask+2: 0(-445,-335) 0(608.57,-331.43)
  round 80 hole 76 slot 76.2 at 90 deg paste+0 mask+2: 0(-341,-296)
  round 60 hole 52 slot 52.2 at 90 deg paste+0 mask+2: 0(480,-295)
  rect 80x100 smd paste+0 mask+2: 0(585,505)
  rect 55x150 smd paste+0 mask+2: 1(-216.45,-458.54) 2(-116.45,-458.54) 3(-16.45,-458.54) 4(83.55,-458.54) 5(183.55,-458.54) 6(283.55,-458.54) 7(363.55,-458.54) 8(438.55,-458.54) 9(-294.45,-459.54)
  rect 30x150 smd paste+0 mask+2: 10(498.55,-458.54) 11(-362.79,-455.87) 11(543.55,-458.54)
  silkscreen extent -530,-539 653,625
?#7 [mil]
  rect 71x10 smd paste+0 mask+2: 1(-443,344) 2(-443,325) 3(-443,305) 4(-443.01,285) 5(-443,266) 6(-443,246) 7(-443,226) 8(-443,207) 9(-443,187) 10(-443,166.99) 11(-443,148) 12(-443,128) 13(-443,108) 14(-443.01,89) 15(-443,69) 16(-443,48.99) 17(-443.01,29) 18(-443.01,10) 19(-443,-10) 20(-443,-30) 21(-443,-49) 22(-443.01,-69) 23(-443,-89) 24(-443.01,-108) 25(-443,-128) 26(-443,-148) 27(-443,-167) 28(-443.01,-187) 29(-443,-207) 30(-443,-226.01) 31(-443,-246) 32(-443,-266) 33(-443,-285) 34(-443,-304.99) 35(-443,-325) 36(-443,-345) 73(442.99,-345) 74(443,-325) 75(443,-305) 76(442.99,-285) 77(443,-266) 78(443,-246) 79(443,-226) 80(443,-207) 81(443,-187) 82(442.99,-167) 83(442.99,-148) 84(443,-128.01) 85(443,-108) 86(443,-89) 87(443,-69) 88(443,-49) 89(442.99,-30) 90(443,-10.01) 91(443,10) 92(443,29) 93(442.99,49) 94(443,69) 95(443,89) 96(442.99,108) 97(443,128) 98(443,148) 99(443,167) 100(443,186.99) 101(443,207) 102(442.99,226) 103(443,246) 104(443,266) 105(443,285) 106(442.99,305) 107(443,325) 108(443,344)
  rect 10x71 smd paste+0 mask+2: 37(-344,-443) 38(-325.01,-443) 39(-305,-443) 40(-285,-443) 41(-266,-443) 42(-246,-443) 43(-226,-443) 44(-207,-443) 45(-187.01,-443) 46(-167,-443) 47(-148,-443) 48(-128.01,-443) 49(-108.01,-443) 50(-89,-443) 51(-69,-442.99) 52(-49,-443) 53(-29,-443) 54(-10,-443) 55(9.99,-443) 56(30,-443) 57(49,-443) 58(69,-443.01) 59(89,-443) 60(108,-443) 61(128,-443) 62(148,-443.01) 63(166.99,-443) 64(187,-443) 65(206.99,-443) 66(226,-443) 67(246,-443) 68(266,-443.01) 69(284.99,-443) 70(305,-443) 71(325,-443) 72(344.99,-443) 109(345,443) 110(324.99,443) 111(305,443) 112(285,443) 113(266,443) 114(246,442.99) 115(226,443) 116(207,443) 117(186.99,443) 118(167,443) 119(148,443) 120(128,443) 121(108,443.01) 122(89,443) 123(68.99,443) 124(48.99,443) 125(30,443) 126(10,443) 127(-10.01,443) 128(-29,443) 129(-49,443) 130(-69,443) 131(-89,443) 132(-108,443) 133(-128,442.99) 134(-148.01,443) 135(-167,443) 136(-187,443) 137(-207,442.99) 138(-226,443) 139(-246,443) 140(-266.01,443) 141(-285,443) 142(-305,443) 143(-325,443) 144(-344,443)
  silkscreen extent -403,-380 382,412
?#8 [mil]
  rect 20x59 smd paste+0 mask+2: 1(-75,-122.5) 2(-25,-122.5) 3(25,-122.5) 4(75,-122.5) 5(75,122.5) 6(25,122.5) 7(-25,122.5) 8(-75,122.5)
  silkscreen extent -100,-79 97,78
?#9 [mil]
  round 51 hole 28 slot 28.2 at 90 deg paste+0 mask+2: 1(0,-150) 2(0,-50) 3(0,50) 4(0,150)
  silkscreen extent -98,-248 138,248
?#10 [mil]
  round 50 hole 28 slot 28.2 at 0 deg paste+0 mask+2: 1(55,195) 2(-45,195)
  silkscreen extent -45,-185 55,165

## Via types
v1: diameter 15, hole 10, Top Layer to Bottom Layer, tented both sides, 426 vias
v2: diameter 24, hole 12, Top Layer to Bottom Layer, tented both sides, 20 vias

## Nets (pads, with @x,y where several pads share a name; then routed paths per layer and width w, separated by ;. In a path a pad name is that pad's centre, name@x,y a point inside that pad or via, vN(x,y) a via of type N, cw(c..) or ccw(c..) an arc to the next point about the centre after c; other vN are vias at no path point)
9: D5.1 DC_IN.1 TP25.P$1 | length 2036
  Top Layer w10: DC_IN.1@3987.11,5475.62 3887.11,5575.62 D5.1@3887.11,5910.62 3887.11,6012.11 4248,6373 4248,6493 4436,6681 4436,6819.01 4545.49,6928.51 4595.49,6928.51 4599.74,6924.26 4599.74,6836.74 4577.11,6814.11 TP25.P$1@4577.11,6720.62
10M100M_7: 10M100M.7
10M100M_10: 10M100M.10 R11.2 | length 664
  Top Layer w10: R11.2@8534.11,7310.62 8534.11,7406.11 8564,7436 8564,7885.01 10M100M.10@8618.61,7939.62
10M100M_11: 10M100M.11 R12.2 | length 636.6
  Top Layer w10: R12.2@8310.11,8550.62 8310.11,8579 8580,8579 8580,8509 8574,8503 8574,8306.23 10M100M.11@8618.61,8261.62
BAT_1: BAT.1 D2.1 | length 849.1
  Top Layer w10: BAT.1@4607.11,8290.62 4607.11,7874 4640.49,7840.62 D2.1@5025.8,7840.62
BEEP: P1.18 R47.1 U3.20 | length 1216.5
  Top Layer w10: P1.18@5069.22,6441.32 5101.54,6409 5137,6409 v1(5170,6376) ; v1(5338,6370) 5341.12,6373.12 5380,6373.12 5380,6387.62 5393,6400.62 R47.1@5417.11,6400.62 5448.61,6400.62 5460.23,6389 5596,6389 v1(5660,6453) ; v1(5920,6762) 6005.19,6762 U3.20@6034.72,6732.47
  Bottom Layer w10: v1(5170,6376) 5332,6376 v1(5338,6370) ; v1(5660,6453) 5660,6502 v1(5920,6762)
BOOT0: R23.1 R36.2 U3.138 | length 1558.9
  Top Layer w10: v1(6503,6869) 6496.6,6869 6496.6,6899.19 U3.138@6519.39,6921.98 ; R23.1@7454.22,7026.32 7466.22,7026.32 R36.2@7466.22,7211.32 v1(7466.22,7242)
  Bottom Layer w10: v1(6503,6869) 6503,7115.98 6629.02,7242 v1(7466.22,7242)
BOOT1: P1.33 R24.2 U3.48 | length 2550.7
  Top Layer w10: P1.33@4969.22,5641.32 5019.44,5591.1 5145,5591.1 5189.22,5546.88 R24.2@5189.22,4988.32 ; v1(5615,6372) 5671,6428 5683,6428 5693.61,6438.61 5915.55,6438.61 6041,6313.16 6041,6283.16 U3.48@5974.41,6216.57
  Bottom Layer w10: P1.33@4969.22,5641.32 4969.22,5677.78 4930.22,5716.78 4930.22,5758.22 4974,5802 4986,5802 5010,5826 5010,5838 5053,5881 5124,5881 5354.26,6111.26 5395.61,6111.26 5395.61,6152.61 v1(5615,6372)
BOOT_3: BOOT.3 R23.2 | length 7249.6
  Top Layer w10: R23.2@7387.22,7026.32 7387.22,6998 7589,6998 7601,6986 7754,6986 7810,6930 7810,6542 v1(7851,6501)
  Bottom Layer w10: BOOT.3@4969.22,4876.32 5031.54,4814 5125,4814 5434,4505 7199,4505 7205,4499 7243,4499 7259,4483 7259,4469 7287,4441 7418,4441 7484.53,4351 7693.46,4349.47 7710.04,4371.05 7762,4370 7783.72,4351.67 8290.67,4351.67 8373,4434 8373,4898 8495.26,5020.26 8495.26,6284.74 8450,6330 8022,6330 v1(7851,6501)
BOOT_4: BOOT.4 R24.1 | length 156.7
  Top Layer w10: BOOT.4@5069.22,4876.32 5175,4876.32 5189.22,4890.54 R24.1@5189.22,4921.32
C60_2: C60.2 R51.1 | length 552.3
  Top Layer w10: R51.1@4807.11,6260.62 4841,6260.62 4866.73,6234.89 4866.73,5959.26 4846.22,5938.75 C60.2@4846.22,5761.32
CAN_RX: P6.1 U4.4 | length 990.7
  Top Layer w10: P6.1@7649.22,4971.32 7699.54,4921 7753.54,4921 7825.07,4849.47 7825.07,4593.07 7818,4586 7810,4586 7773.13,4549.13 7773.13,4511.13 7778.08,4506.18 7855.08,4506.18 7944.11,4595.21 7944.11,4745.62 U4.4@7904.61,4745.62
CAN_TX: P6.2 U4.1 | length 186.7
  Top Layer w10: P6.2@7749.22,4971.32 7824.92,4895.62 U4.1@7904.61,4895.62
CH340_D+: U5.5 USB_1.3 | length 1712.4
  Top Layer w10: U5.5@5716.22,7871.32 5716.22,8011 6114.22,8409 6156,8409 6219.64,8472.64 6296.36,8472.64 6386,8383 6415,8383 6442,8356 6442,8304 6471.7,8274.3 6716.3,8274.3 6754,8312 6754,8364 6777.12,8387.12 6852.88,8387.12 6855,8385 USB_1.3@6855,8333
CH340_D-: U5.6 USB_1.2 | length 1774.1
  Top Layer w10: U5.6@5691.22,7871.32 5691.22,8199.22 5933,8441 6166.46,8441 6211.71,8486.25 6315.74,8486.25 6395.41,8406.59 6614.58,8406.59 6616,8408 6738,8408 USB_1.2@6767,8437 6856.13,8437 6887,8406.13 USB_1.2@6887,8333
DHT11/18B10: R50.1 U9.2 | length 616
  Top Layer w10: R50.1@5074.22,4381.32 5074.22,3897.78 5087.11,3884.89 U9.2@5087.11,3770.62
FSMC_A0: P1.10 U3.10 | length 1250.1
  Top Layer w10: P1.10@5069.22,6841.32 5123.32,6841.32 5290.48,7008.48 5352.52,7008.48 5361,7000 5361,6961 5383,6939 5482.52,6939 5507.52,6914 6131.74,6914 U3.10@6171.56,6874.18
FSMC_A1: P1.9 U3.11 | length 1304.3
  Top Layer w10: P1.9@4969.22,6841.32 4969.22,6802 4972.05,6799.17 5159.17,6799.17 v1(5280,6920) ; v1(5464,6920) 5483.38,6900.62 6118.27,6900.62 U3.11@6158.37,6860.52
  Bottom Layer w10: v1(5280,6920) v1(5464,6920)
FSMC_A2: P1.12 U3.12 | length 1203.9
  Top Layer w10: v1(5360,6850) 5360,6876 5388.59,6904.59 5434.17,6904.59 5451.14,6887.62 6102.98,6887.62 U3.12@6144.47,6846.13
  Bottom Layer w10: P1.12@5069.22,6741.32 5069.22,6778.22 5141,6850 v1(5360,6850)
FSMC_A3: P1.11 U3.13 | length 1403.4
  Top Layer w10: v1(5395,6889) 5426.62,6889 5441.62,6874 6088.32,6874 U3.13@6130.58,6831.74
  Bottom Layer w10: P1.11@4969.22,6741.32 4930,6741.32 4930,6857.32 4974.68,6902 5382,6902 v1(5395,6889)
FSMC_A4: P1.14 U3.14 | length 1604.3
  Top Layer w10: P1.14@5069.22,6641.32 5262.68,6641.32 5295,6609 5295,6391 5331.77,6354.23 5627.1,6354.23 5688.87,6416 5832.46,6416 v1(5839.46,6423) ; U3.14@6117.38,6818.08 6142.96,6792.5 v1(6162.46,6792.5)
  Bottom Layer w10: v1(5839.46,6423) 6162.46,6746 v1(6162.46,6792.5)
FSMC_A5: P1.13 U3.15 | length 1278.3
  Top Layer w10: P1.13@4969.22,6641.32 5001,6641.32 5040.32,6602 5273.84,6602 v1(5278.84,6597) ; v1(5642,6852) 6055.18,6852 U3.15@6103.49,6803.69
  Bottom Layer w10: v1(5278.84,6597) 5387,6597 v1(5642,6852)
FSMC_A6: P1.35 TFT_LCD1.2 U3.50 | length 6467.1
  Top Layer w10: v1(5976,6129) 5976,6163.01 U3.50@6002.47,6189.48 ; v1(7115,4463) 7203.01,4551.01 7203.01,4680.21 7154.22,4729 TFT_LCD1.2@7154.22,4771.32
  Bottom Layer w10: P1.35@4969.22,5541.32 4931.22,5503.32 4931.22,5424.78 4972,5384 4981,5384 5007.34,5357.66 5007.34,5325.33 4984,5302 4976,5302 4930.74,5256.74 4930.74,4761.74 4931.06,4761.74 ; v1(5976,6129) 6383.93,6129 6442.71,6070.23 6442.71,6015.16 6442,6014.46 6442,5941.61 6421.19,5920.81 6373.19,5920.81 6370.36,5923.64 6005.64,5923.64 5273,5191 4965,5191 4931.06,5157.06 4931.06,4761.74 ; v1(7115,4463) 5228.8,4463 4931.06,4760.74 4931.06,4761.74
FSMC_A7: P1.38 U3.53 | length 1393.1
  Top Layer w10: U3.53@6045.63,6147.8 6082.83,6185 v1(6092,6185)
  Bottom Layer w10: P1.38@5069.22,5441.32 5069.22,5441 5160,5441 5364,5645 5408,5645 5912,6149 6056,6149 v1(6092,6185)
FSMC_A8: P1.37 U3.54 | length 1543.5
  Top Layer w10: v1(5982,6100) 6024.7,6100 U3.54@6059.3,6134.6
  Bottom Layer w10: P1.37@4969.22,5441.32 5002.68,5441.32 5027,5417 5027,5329 5053.16,5302.84 5164.84,5302.84 5960,6098 5980,6098 v1(5982,6100)
FSMC_A9: P1.40 U3.55 | length 1367.9
  Top Layer w10: v1(5956,6121) 5956,6104 5976,6084 6036.97,6084 U3.55@6073.68,6120.71
  Bottom Layer w10: P1.40@5069.22,5341.32 5102.84,5341.32 5371.02,5609.5 5399.86,5609.5 5911.36,6121 v1(5956,6121)
FSMC_A10: P1.39 U3.56 | length 1875.4
  Top Layer w10: U3.56@6088.07,6106.81 6110,6128.74 6110,6181.74 v1(6126,6197.74)
  Bottom Layer w10: P1.39@4969.22,5341.32 4934,5341.32 4934,5374.54 4917.74,5390.8 4917.74,5543.8 4957.93,5584 5247.5,5584 5863.5,6200 6004.46,6200 6056.79,6252.33 6071.42,6252.33 v1(6126,6197.74)
FSMC_A11: P1.42 U3.57 | length 1385.6
  Top Layer w10: v1(6037.33,6029.21) U3.57@6101.74,6093.62
  Bottom Layer w10: P1.42@5069.22,5241.32 5249.44,5241.32 v1(6037.33,6029.21)
FSMC_A12: P2.38 U3.87 | length 1543.9
  Top Layer w10: U3.87@6644.96,6088.95 6717,6016.91 v1(6717,5858)
  Bottom Layer w10: v1(6717,5858) 6717,5771.79 6739.21,5771.79 7122.86,5388.14 7668.82,5388.14 7707,5426.32 P2.38@7739.22,5426.32
FSMC_A13: P2.37 U3.88 | length 1386.9
  Top Layer w10: U3.88@6658.85,6103.34 6736,6026.19 v1(6736,5811)
  Bottom Layer w10: v1(6736,5811) 7120.68,5426.32 P2.37@7639.22,5426.32
FSMC_A14: P2.36 U3.89 | length 1491
  Top Layer w10: U3.89@6672.05,6117.01 v1(6712.06,6077)
  Bottom Layer w10: v1(6712.06,6077) 6712.06,6046.06 6656.91,5990.91 6656.91,5977.91 7146.9,5487.91 7675.91,5487.91 7695,5507 7739.22,5507 P2.36@7739.22,5526.32
FSMC_A15: P2.35 U3.90 | length 1469.7
  Top Layer w10: U3.90@6685.94,6131.39 6687.61,6131.39 6727.91,6091.09 6801.09,6091.09 6847,6137 v1(6847,6146) ; v1(7391,6019) 7545,5865 7545,5590 7608.68,5526.32 P2.35@7639.22,5526.32
  Bottom Layer w10: v1(6847,6146) 6847,6173.04 6865.98,6192.02 6889.98,6192.02 7063,6019 v1(7391,6019)
FSMC_A16: P2.41 U3.80 | length 1465
  Top Layer w10: U3.80@6549.1,5989.68 6669.56,5869.22 6669.56,5769 v1(6685.56,5753)
  Bottom Layer w10: v1(6685.56,5753) 6700.91,5737.64 7212.24,5226.32 P2.41@7639.22,5226.32
FSMC_A17: P2.40 U3.81 | length 1666.9
  Top Layer w10: U3.81@6562.99,6004.07 6590.06,5977 6596.06,5983 6673,5983 v1(6673,5984)
  Bottom Layer w10: v1(6673,5984) 7082,5575 7744.32,5575 7778,5541.32 7778,5326.32 P2.40@7739.22,5326.32
FSMC_A18: P2.39 U3.82 | length 1472.5
  Top Layer w10: U3.82@6576.88,6018.46 6599.08,5996.26 6623.26,5996.26 v1(6641,6014)
  Bottom Layer w10: v1(6641,6014) 6641,5829 7143,5327 7639.22,5327 P2.39@7639.22,5326.32
FSMC_D0: P3.1 TFT_LCD1.6 U3.85 | length 2128.1
  Top Layer w10: U3.85@6617.87,6060.9 6680.01,5998.76 6688.5,5998.76 6688.5,5781.06 6701.06,5768.5 6700.74,5730.21 6699.9,5723.1 6700,5640 6701.06,5633.89 6701.06,5310.68 6701.06,5308.41 6698.17,5288.78 6698.17,5191 6701.06,5174.71 6701.06,4618.94 v1(6711,4609)
  Bottom Layer w10: v1(6711,4609) 6724.48,4595.52 6870.73,4595.52 6910,4634.78 6910,4718.78 TFT_LCD1.6@6954.22,4763 ; TFT_LCD1.6@6954.22,4771.32 TFT_LCD1.6@6954.22,4763 ; P3.1@7149.22,4646.32 7085.54,4710 6985,4710 6954.22,4740.78 TFT_LCD1.6@6954.22,4763
FSMC_D1: P3.2 TFT_LCD1.7 U3.86 | length 1802.5
  Top Layer w10: U3.86@6631.07,6074.57 6639.1,6074.57 6701.5,6012.17 6701.5,5842.74 6715,5829.24 6715,5747.67 6729,5735.17 6730,5641 6715,5625.17 6715,5308.32 6727,5298.82 6726.5,5195 6715,5181.82 6715,4915 6725,4905 6725,4853 6743,4835 v1(6782,4835) ; TFT_LCD1.7@6854.22,4871.32 6854.22,4839.78 6873,4821 6952.54,4821 7016,4757.54 7016,4679.54 P3.2@7049.22,4646.32
  Bottom Layer w10: v1(6782,4835) 6826,4879 6854.22,4879 TFT_LCD1.7@6854.22,4871.32
FSMC_D2: P3.3 TFT_LCD1.8 U3.114 | length 2228.7
  Top Layer w10: TFT_LCD1.8@6854.22,4771.32 6854.22,4741.32 P3.3@6949.22,4646.32 ; U3.114@6858.91,6594.1 6837,6572.19 6837,6553 6851.61,6538.39 6851.61,6530.39 v1(6863,6519)
  Bottom Layer w10: TFT_LCD1.8@6854.22,4771.32 6854.22,4802.22 6888.16,4836.16 6888.16,5515.49 6624.86,5778.79 6624.86,6177.86 6808,6361 6808,6448.88 6863,6503.88 v1(6863,6519)
FSMC_D3: P3.4 TFT_LCD1.9 U3.115 | length 2173.8
  Top Layer w10: TFT_LCD1.9@6754.22,4871.32 6754.22,5614.08 6759.03,5631.11 6759.03,5734 6754.22,5751.11 6754.22,6010.93 6881.62,6138.33 6899.62,6138.33 6972.67,6211.38 6972.67,6354.1 6969.14,6357.64 6969.14,6388.66 6823.34,6534.45 6823.34,6586.06 U3.115@6844.53,6608
  Bottom Layer w10: TFT_LCD1.9@6754.22,4871.32 6754.22,4840.78 6824,4771 6824,4671.54 P3.4@6849.22,4646.32
FSMC_D4: P3.5 TFT_LCD1.10 U3.58 | length 1987.5
  Top Layer w10: U3.58@6116.12,6079.72 v1(6209,6172.6) ; P3.5@6749.22,4646.32 6754.22,4646.32 TFT_LCD1.10@6754.22,4771.32
  Bottom Layer w10: v1(6209,6172.6) 6378,6172.6 6474,6076.6 6474,5821 6726,5569 6726,4807.22 6754.22,4779 TFT_LCD1.10@6754.22,4771.32
FSMC_D5: P3.6 TFT_LCD1.11 U3.59 | length 1699.7
  Top Layer w10: v1(6086.84,5894.16) 6086.84,6022.16 U3.59@6130.51,6065.83 ; P3.6@6649.22,4646.32 6619,4676.54 6619,4808 6654.22,4843.22 TFT_LCD1.11@6654.22,4871.32
  Bottom Layer w10: v1(6086.84,5894.16) 6086.84,5734.16 6654.22,5166.78 TFT_LCD1.11@6654.22,4871.32
FSMC_D6: P3.7 TFT_LCD1.12 U3.60 | length 2236.2
  Top Layer w10: U3.60@6144.18,6052.63 6103,6011.45 6103,5728.6 6100.1,5724.66 6100.63,5638.86 6103,5633.34 6103,5286.35 6100.89,5282.66 6100.89,5189.77 6103,5183.72 6103,4668 6110,4661 6110,4632 6147.48,4594.52 6472.2,4594.52 6524,4646.32 P3.7@6549.22,4646.32 6590.68,4646.32 6628.63,4608.37 6665,4608.37 6686.92,4630.29 6686.92,4715.3 6654.22,4748 TFT_LCD1.12@6654.22,4771.32
FSMC_D7: P3.8 TFT_LCD1.13 U3.63 | length 1632
  Top Layer w10: v1(6142,5618) 6132.79,5618 6132.79,5957.82 U3.63@6186.62,6011.65 ; P3.8@6449.22,4646.32 6485,4646.32 6499,4660.32 6499,4807.78 6554.22,4863 TFT_LCD1.13@6554.22,4871.32
  Bottom Layer w10: v1(6142,5618) 6554.22,5205.78 TFT_LCD1.13@6554.22,4871.32